# Altium PCB PCB1.PcbDoc
Units mm, origin at the board's own origin, x right, y up, seen from the top; angles counter-clockwise.
Board outline 47.62 x 51.43 mm, 2 copper layers (Top Layer, Bottom Layer); 94 components, 64 nets, 274 pads, 84 vias.
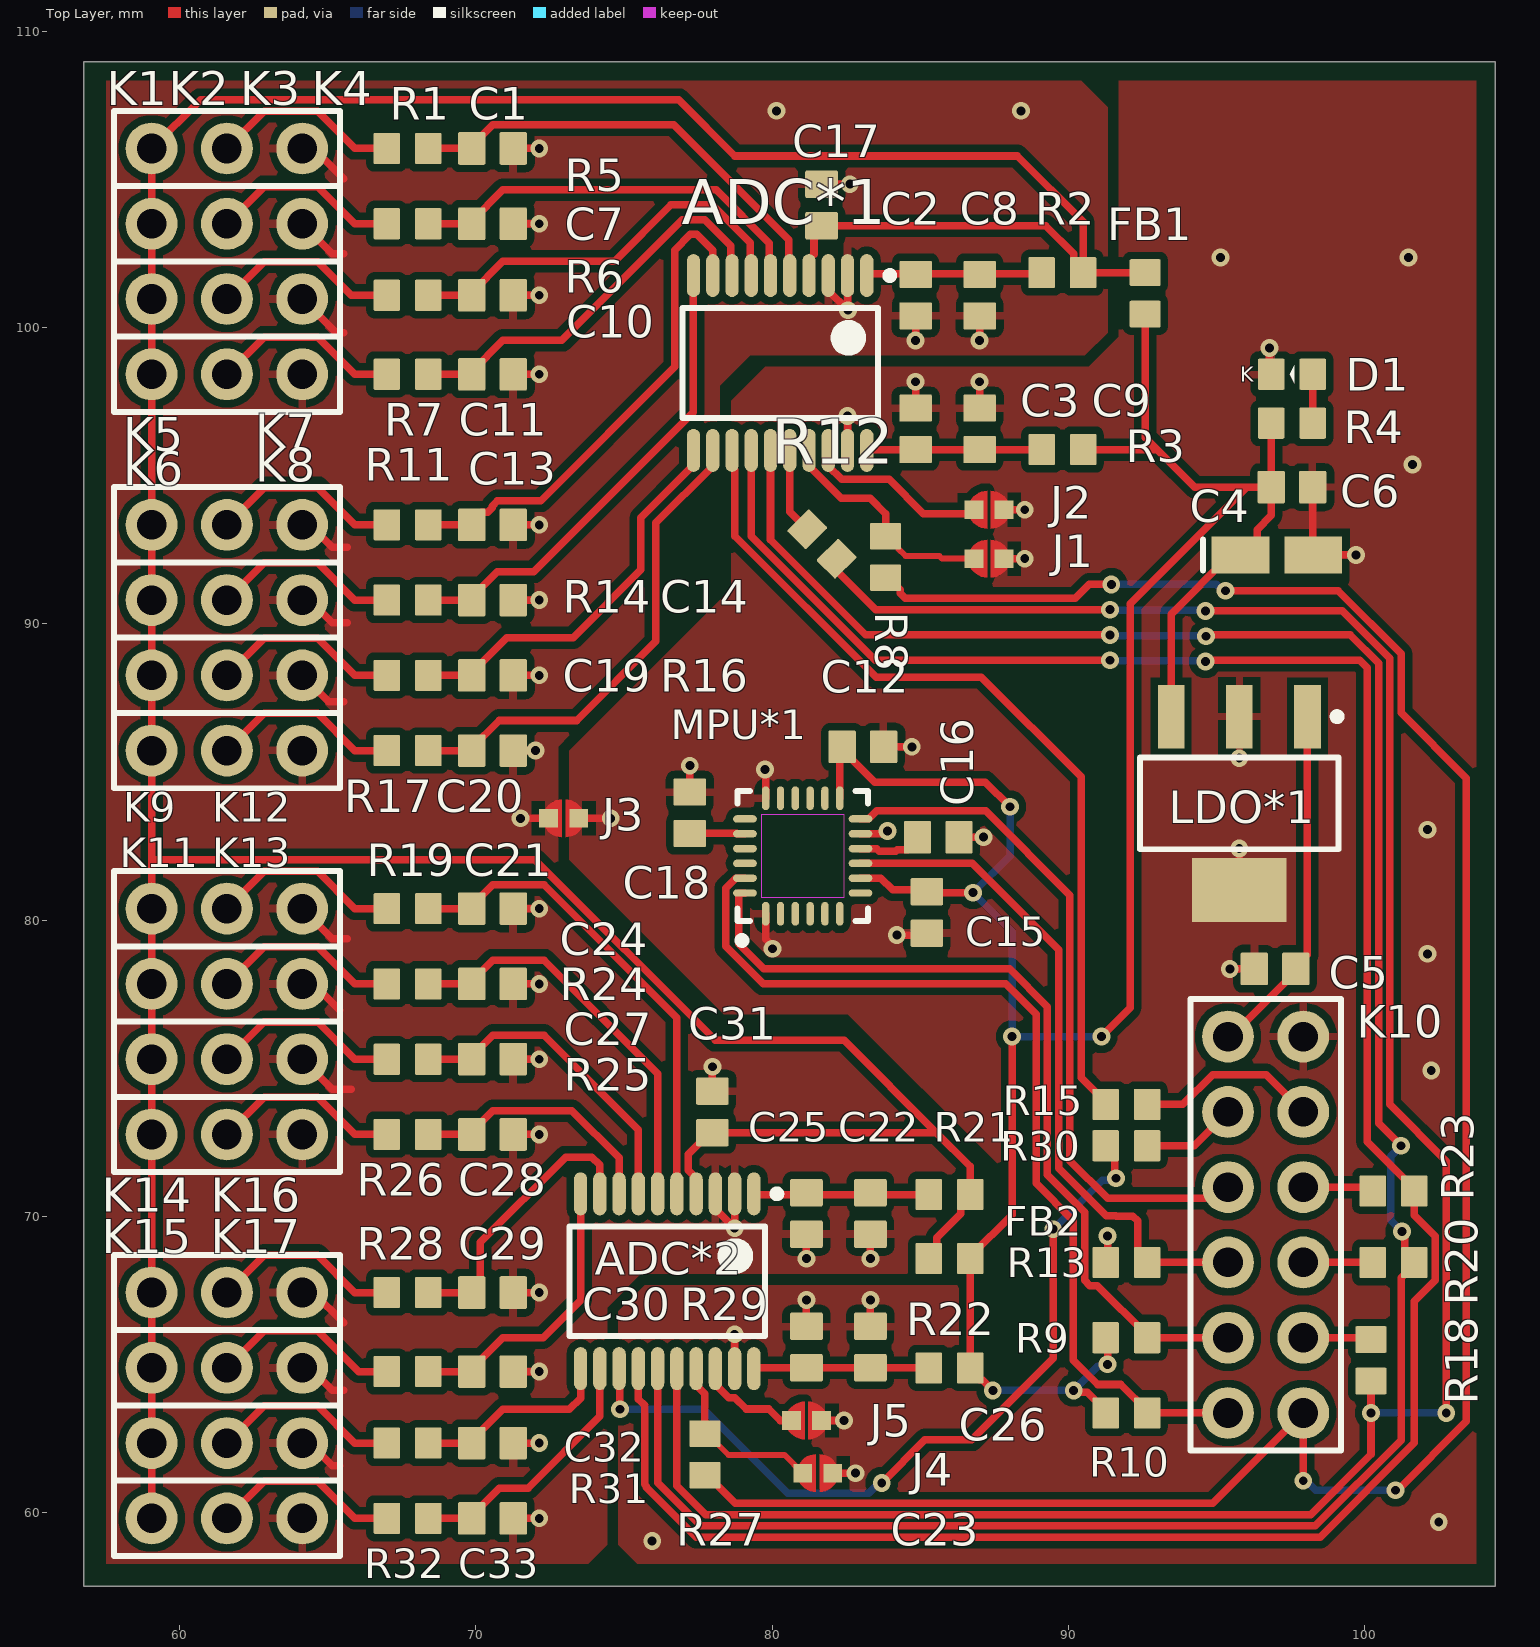
[diagram p0: Top Layer view]
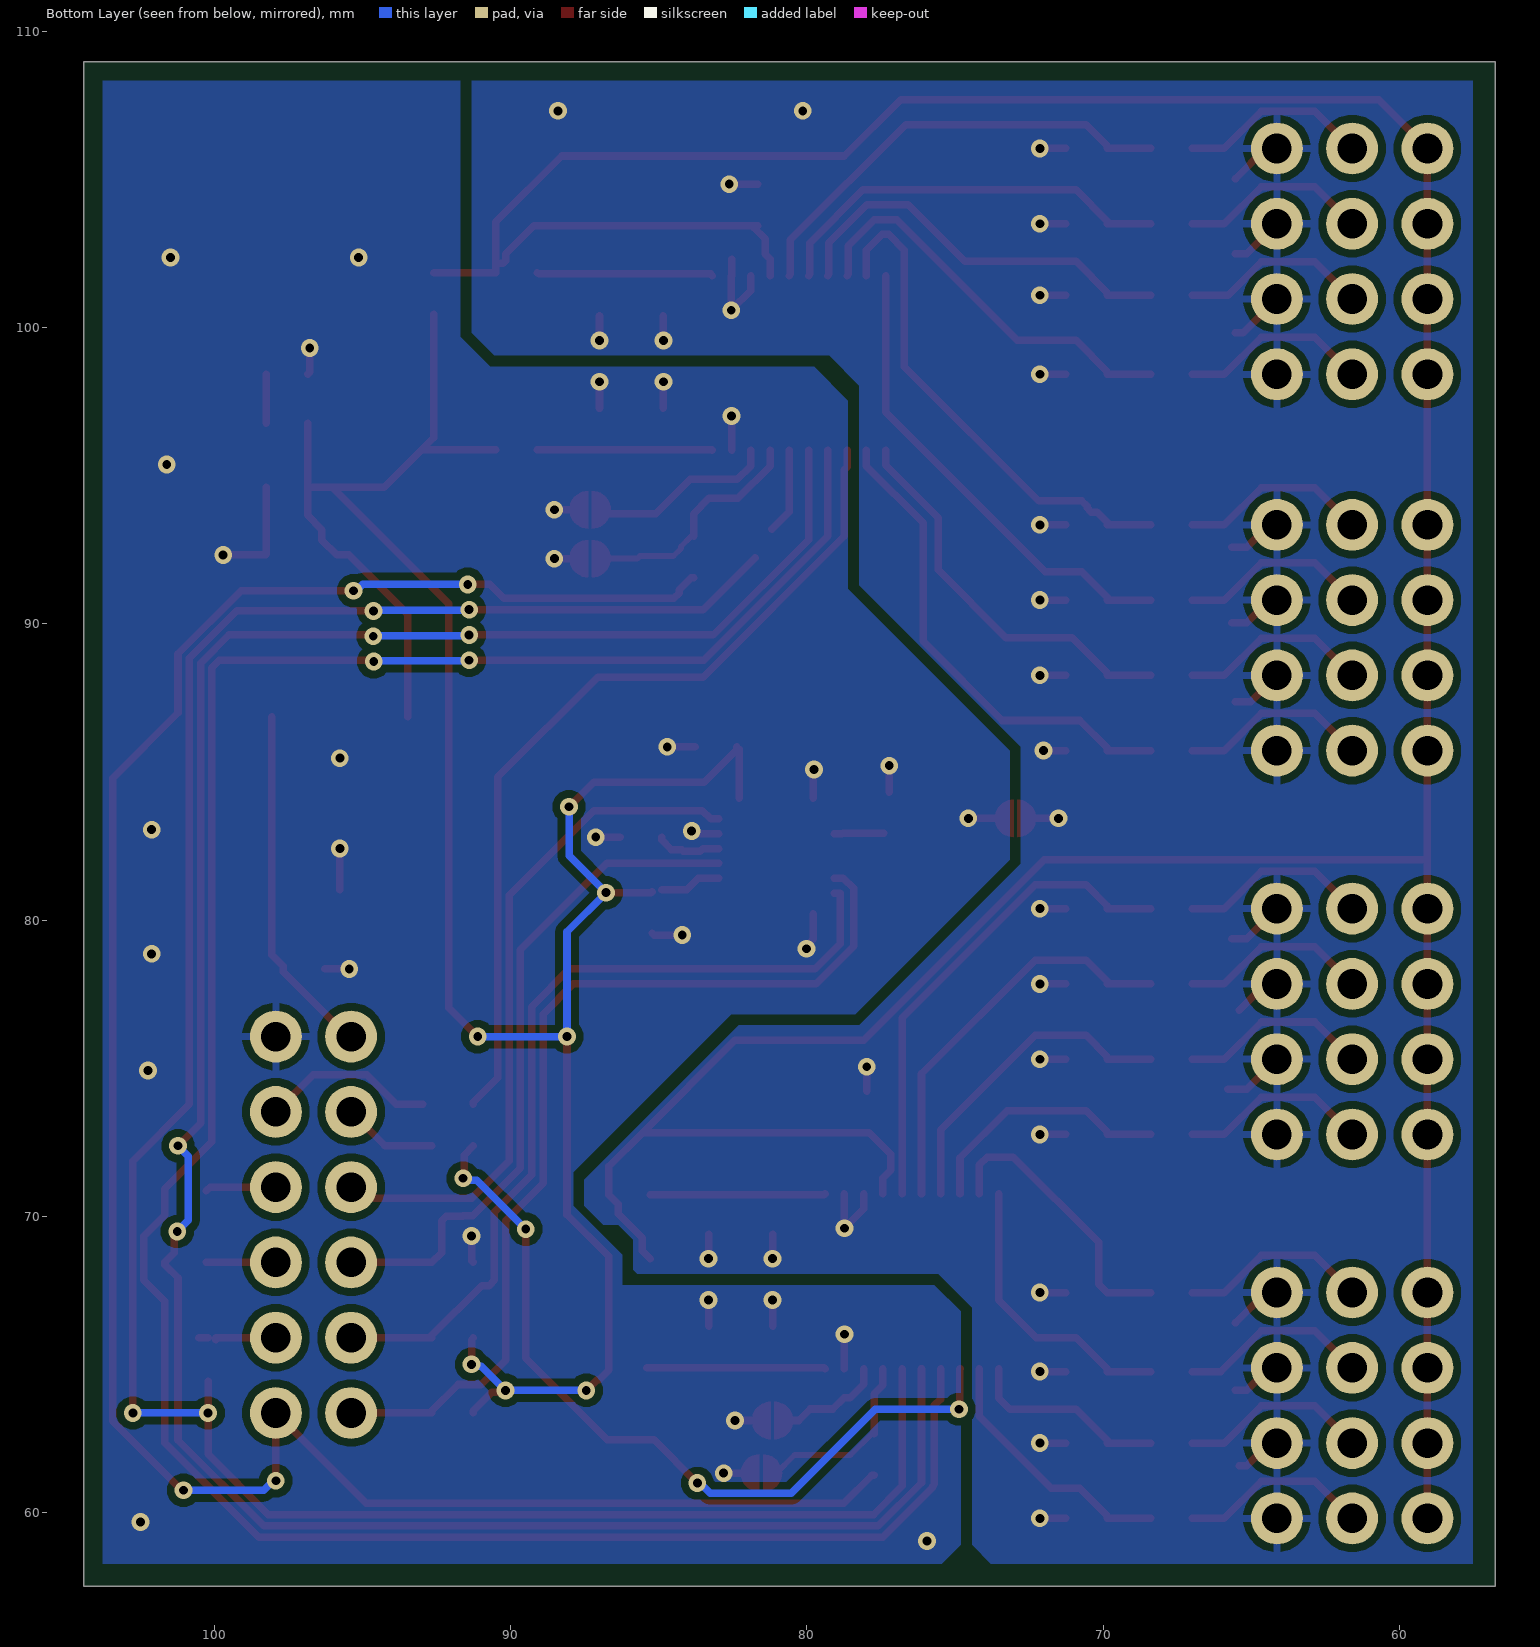
[diagram p1: Bottom Layer view, seen from below]

## Layer stack, top to bottom
Top Solder: solder mask 0.0102, Solder Resist, Dk 3.5
Top Layer: signal copper 0.0356
Dielectric 1: dielectric 0.32, FR-4, Dk 4.8
Bottom Layer: signal copper 0.0356
Bottom Solder: solder mask 0.0102, Solder Resist, Dk 3.5

## Board outline
56.769,57.531 56.769,108.966 104.394,108.966 104.394,57.531

## Design rules (kind name [scope] priority, off if disabled: settings)
Clearance [All] p1: gap=0.254 ignorepadtopadclearanceinfootprint=TRUE except(0: Arc-Hole Track-Hole SMDPad-Hole THPad-Hole Via-Hole Fill-Hole Poly-Hole Region-Hole Text-Hole; 0.127: Arc-Arc Arc-Track Arc-SMDPad Track-Track Track-SMDPad SMDPad-SMDPad SMDPad-Fill Region-Region)
PolygonConnect [All] p1: connectstyle=Relief reliefconductorwidth=0.254 reliefentries=4 polygonreliefangle="90 Angle" airgapwidth=0.254
RoutingVias [All] p1: holewidth=0.3 width=0.6 viastyle="Through Hole" minholewidth=0.1 minwidth=0.1 maxholewidth=0.711 maxwidth=1.27
SilkToSilkClearance [All] p1: silktosilkclearance=0.1
SolderMaskExpansion [All] p1: expansion=0.102 istentingtop=FALSE
Width [All] p1: maxlimit=0.254 minlimit=0.127 preferedwidth=0.254 bottomlayer_minwidth=0.254 minimp=50.000000 maximp=50.000000 favimp=50.000000
29 further rules are at their usual default settings.

## Classes and differential pairs
component class Sheet1: ADC1 ADC2 C1 C2 C3 C4 C5 C6 C7 C8 C9 C10 C11 C12 C13 C14 C15 C16 C17 C18 C19 C20 C21 C22 C23 C24 C25 C26 C27 C28 C29 C30 C31 C32 C33 D1 FB1 FB2 K1 K2 K3 K4 K5 K6 K7 K8 K9 K10 K11 K12 K13 K14 K15 K16 K17 LDO1 MPU1 R1 R2 R3 R4 R5 R6 R7 R8 R9 R10 R11 R12 R13 R14 R15 R16 R17 R18 R19 R20 R21 R22 R23 R24 R25 R26 R27 R28 R29 R30 R31 R32

## Components (designator, comment, footprint, x,y, rotation, side; value= is the part's Value field where it differs from the comment)
ADC*1 "MCP3464" "TSOP65P640X120-20N ADC" 80.264,98.806 r270 top
ADC*2 "MCP3464" "TSOP65P640X120-20N ADC" 76.454,67.818 r270 top
C1 "0.1uF" C1608_0603I_M 70.557,106.045 r180 top
C2 "0.1uF" C1608_0603I_M 84.836,101.092 r270 top
C3 "0.1uF" C1608_0603I_M 84.836,96.585 r270 top
C4 "10uF" "C Tantal A" 97.028,92.329 r0 top
C5 "4.7uF" C1608_0603I_M 96.963,78.359 r180 top
C6 "4.7uF" C1608_0603I_M 97.536,94.615 r0 top
C7 "0.1uF" C1608_0603I_M 70.557,103.505 r180 top
C8 "0.1uF" C1608_0603I_M 86.995,101.092 r270 top
C9 "0.1uF" C1608_0603I_M 86.995,96.585 r270 top
C10 "0.1uF" C1608_0603I_M 70.557,101.092 r180 top
C11 "0.1uF" C1608_0603I_M 70.557,98.425 r180 top
C12 "0.1uF" C1608_0603I_M 83.058,85.852 r180 top
C13 "0.1uF" C1608_0603I_M 70.557,93.345 r180 top
C14 "0.1uF" C1608_0603I_M 70.557,90.805 r180 top
C15 "10nF" C1608_0603I_M 85.217,80.264 r270 top
C16 "0.1uF" C1608_0603I_M 85.598,82.804 r180 top
C17 "0.1uF" C1608_0603I_M 81.661,104.14 r270 top
C18 "2.2nF" C1608_0603I_M 77.216,83.628 r90 top
C19 "0.1uF" C1608_0603I_M 70.557,88.265 r180 top
C20 "0.1uF" C1608_0603I_M 70.557,85.725 r180 top
C21 "0.1uF" C1608_0603I_M 70.557,80.391 r180 top
C22 "0.1uF" C1608_0603I_M 83.312,70.104 r270 top
C23 "0.1uF" C1608_0603I_M 81.153,65.597 r270 top
C24 "0.1uF" C1608_0603I_M 70.557,77.851 r180 top
C25 "0.1uF" C1608_0603I_M 81.153,70.104 r270 top
C26 "0.1uF" C1608_0603I_M 83.312,65.597 r270 top
C27 "0.1uF" C1608_0603I_M 70.557,75.311 r180 top
C28 "0.1uF" C1608_0603I_M 70.557,72.771 r180 top
C29 "0.1uF" C1608_0603I_M 70.557,67.437 r180 top
C30 "0.1uF" C1608_0603I_M 70.557,64.77 r180 top
C31 "0.1uF" C1608_0603I_M 77.978,73.533 r270 top
C32 "0.1uF" C1608_0603I_M 70.557,62.357 r180 top
C33 "0.1uF" C1608_0603I_M 70.557,59.817 r180 top
D1 "LED" LED1608_0603I_M 97.536,98.425 r0 top
FB1 "FERITTE BEAD" R1608_0603I_M 92.583,101.157 r90 top
FB2 "FERITTE BEAD" R1608_0603I_M 85.979,68.58 r180 top
J1 "JMP_mini" solderJumper 87.312,92.202 r180 top
J2 "JMP_mini" solderJumper 87.312,93.853 r180 top
J3 "JMP_mini" solderJumper 72.958,83.44 r0 top
J4 "JMP_mini" solderJumper 81.534,61.341 r180 top
J5 "JMP_mini" solderJumper 81.155,63.119 r180 top
K1 "H1x3" H1x3 59.055,106.045 r180 top
K2 "H1x3" H1x3 59.055,103.505 r180 top
K3 "H1x3" H1x3 59.055,100.965 r180 top
K4 "H1x3" H1x3 59.055,98.425 r180 top
K5 "H1x3" H1x3 59.055,93.345 r180 top
K6 "H1x3" H1x3 59.055,90.805 r180 top
K7 "H1x3" H1x3 59.055,88.265 r180 top
K8 "H1x3" H1x3 59.055,85.725 r180 top
K9 "H1x3" H1x3 59.055,80.391 r180 top
K10 "H2x6" H2x6 97.917,63.373 r270 top
K11 "H1x3" H1x3 59.055,77.851 r180 top
K12 "H1x3" H1x3 59.055,75.311 r180 top
K13 "H1x3" H1x3 59.055,72.771 r180 top
K14 "H1x3" H1x3 59.055,67.437 r180 top
K15 "H1x3" H1x3 59.055,64.897 r180 top
K16 "H1x3" H1x3 59.055,62.357 r180 top
K17 "H1x3" H1x3 59.055,59.817 r180 top
LDO*1 "TC1108" "SOT230P700X180-4N 3V3 LDO" 95.758,83.947 r270 top
MPU*1 "MPU6050" QFN50P400X400X95_HS-25N 81.026,82.169 r90 top
R1 "1k" R1608_0603I_M 67.691,106.045 r0 top
R2 "10" R1608_0603I_M 89.789,101.854 r180 top
R3 "10" R1608_0603I_M 89.789,95.885 r180 top
R4 "1k" R1608_0603I_M 97.536,96.774 r0 top
R5 "1k" R1608_0603I_M 67.691,103.505 r0 top
R6 "1k" R1608_0603I_M 67.691,101.092 r0 top
R7 "1k" R1608_0603I_M 67.691,98.425 r0 top
R8 "10" R1608_0603I_M 83.82,92.264 r270 top
R9 "4k7" R1608_0603I_M 91.948,65.913 r180 top
R10 "4k7" R1608_0603I_M 91.948,63.373 r0 top
R11 "1k" R1608_0603I_M 67.691,93.345 r0 top
R12 "10" R1608_0603I_M 81.674,92.697 r315 top
R13 "4k7" R1608_0603I_M 91.948,68.453 r180 top
R14 "1k" R1608_0603I_M 67.691,90.805 r0 top
R15 "10" R1608_0603I_M 91.948,73.787 r0 top
R16 "1k" R1608_0603I_M 67.691,88.265 r0 top
R17 "1k" R1608_0603I_M 67.691,85.725 r0 top
R18 "10" R1608_0603I_M 100.203,65.151 r90 top
R19 "1k" R1608_0603I_M 67.691,80.391 r0 top
R20 "10" R1608_0603I_M 100.965,68.453 r180 top
R21 "10" R1608_0603I_M 85.979,70.739 r180 top
R22 "10" R1608_0603I_M 85.979,64.897 r180 top
R23 "10" R1608_0603I_M 100.965,70.866 r180 top
R24 "1k" R1608_0603I_M 67.691,77.851 r0 top
R25 "1k" R1608_0603I_M 67.691,75.311 r0 top
R26 "1k" R1608_0603I_M 67.691,72.771 r0 top
R27 "10" R1608_0603I_M 77.724,61.976 r270 top
R28 "1k" R1608_0603I_M 67.691,67.437 r0 top
R29 "1k" R1608_0603I_M 67.691,64.77 r0 top
R30 "10" R1608_0603I_M 91.948,72.39 r0 top
R31 "1k" R1608_0603I_M 67.691,62.357 r0 top
R32 "1k" R1608_0603I_M 67.691,59.817 r0 top

## Footprints (in the part's own frame and the unit in brackets; to place one, negate y for a bottom-side part, rotate by r counter-clockwise, add the part's x,y. Pads: shape width x height; smd on the part's side, far side on the other; paste and mask are expansions set on the pad)
C1608_0603I_M [mm] "Chip Capacitor, 2-Leads, Body 1.57x0.85mm, IPC Low Density"
  rrect10% 0.92x1.1 smd: 1(-0.7,0) 2(0.7,0)
  body extent -0.82,-0.48 0.82,0.48, height 0.95
"C Tantal A" [mm] "Molded Capacitor, 2-Leads, Body 3,2x1,6mm, IPC Medium Density"
  rect 1.95x1.25 smd: 1(-1.225,0) 2(1.225,0)
  silkscreen extent -2.5,-0.53 -2.5,0.53, body extent -1.6,-0.81 1.6,0.79, height 1.63
H1x3 [mm]
  round 1.75 hole 1: 1(0,0) 2(-2.54,0) 3(-5.08,0)
  silkscreen extent -6.35,-1.27 1.27,1.27, body extent -6.35,-1.27 1.27,1.27, height 8.4
H2x6 [mm]
  round 1.75 hole 1: 1(0,0) 2(0,-2.54) 3(-2.54,0) 4(-2.54,-2.54) 5(-5.08,0) 6(-5.08,-2.54) 7(-7.62,0) 8(-7.62,-2.54) 9(-10.16,0) 10(-10.16,-2.54) 11(-12.7,0) 12(-12.7,-2.54)
  silkscreen extent -13.97,-3.81 1.27,1.27, body extent -13.97,-3.81 1.27,1.27, height 8.4
LED1608_0603I_M [mm] "SMD LED, 2-Leads, Body 1.57x0.85mm, IPC Low Density"
  rrect10% 0.9x1.05 smd: 1(-0.7,0) 2(0.7,0)
  silkscreen extent -0.07,-0.3 0.08,0.3, body extent -0.8,-0.4 0.8,0.4, height 0.7
QFN50P400X400X95_HS-25N [mm] "QFN, 24-Leads, Body 4.00x4.00mm, Pitch 0.50mm, Thermal Pad 2.60x2.70mm, IPC Medium Density"
  oval 0.8x0.25 smd: 1(-1.95,1.25) 2(-1.95,0.75) 3(-1.95,0.25) 4(-1.95,-0.25) 5(-1.95,-0.75) 6(-1.95,-1.25) 13(1.95,-1.25) 14(1.95,-0.75) 15(1.95,-0.25) 16(1.95,0.25) 17(1.95,0.75) 18(1.95,1.25)
  oval 0.25x0.8 smd: 7(-1.25,-1.95) 8(-0.75,-1.95) 9(-0.25,-1.95) 10(0.25,-1.95) 11(0.75,-1.95) 12(1.25,-1.95) 19(1.25,1.95) 20(0.75,1.95) 21(0.25,1.95) 22(-0.25,1.95) 23(-0.75,1.95) 24(-1.25,1.95)
  silkscreen extent -2.97,-2.2 2.2,2.2, body extent -2.05,-2.05 2.05,2.05, height 0.95
R1608_0603I_M [mm] "Chip Resistor, 2-Leads, Body 1.57x0.85mm, IPC Low Density"
  rrect10% 0.9x1.05 smd: 1(-0.7,0) 2(0.7,0)
  body extent -0.83,-0.48 0.82,0.48, height 0.5
solderJumper [mil]
  rect 25x25 smd: 1(20,0) 2(-20,0)
  Top Layer region: -2.51,25 -12.08,23.1 -20.19,17.68 -25.61,9.57 -27.51,0 -27.51,0 -25.61,-9.57 -20.19,-17.68 -12.08,-23.1 -2.51,-25 -2.51,-25
  Top Layer region: 2.51,25 12.08,23.1 20.19,17.68 25.61,9.57 27.51,0 27.51,0 25.61,-9.57 20.19,-17.68 12.08,-23.1 2.51,-25 2.51,-25
"SOT230P700X180-4N 3V3 LDO" [mm] "SOT223, 4-Leads, Body 6.50x7.00mm (avg), Pitch 2.30mm, IPC Medium Density"
  rect 2.15x0.9 smd: 1(-2.925,2.3) 2(-2.925,0) 3(-2.925,-2.3)
  rect 2.15x3.2 smd: 2(2.925,0)
  silkscreen extent -3.05,-3.35 1.55,3.43, body extent -3.5,-3.35 3.5,3.35, height 1.8
"TSOP65P640X120-20N ADC" [mm] "TSOP, 20-Leads, Body 6.50x4.40mm, Pitch 0.65mm, IPC Medium Density"
  oval 1.45x0.45 smd: 1(-2.95,2.925) 2(-2.95,2.275) 3(-2.95,1.625) 4(-2.95,0.975) 5(-2.95,0.325) 6(-2.95,-0.325) 7(-2.95,-0.975) 8(-2.95,-1.625) 9(-2.95,-2.275) 10(-2.95,-2.925) 11(2.95,-2.925) 12(2.95,-2.275) 13(2.95,-1.625) 14(2.95,-0.975) 15(2.95,-0.325) 16(2.95,0.325) 17(2.95,0.975) 18(2.95,1.625) 19(2.95,2.275) 20(2.95,2.925)
  silkscreen extent -3.07,-3.3 1.85,3.83, body extent -3.2,-3.3 3.2,3.3, height 1.2

## Part data
C1 C2 C3 C5 C6 C7 C8 C9 C10 C11 C12 C13 C14 C15 C16 C17 C18 C19 C20 C21 C22 C23 C24 C25 C26 C27 C28 C29 C30 C31 C32 C33: library part C, "Capacitor"
C4: library part C+, "Capacitor Polarized"
K1 K2 K3 K4 K5 K6 K7 K8 K9 K11 K12 K13 K14 K15 K16 K17: "Header 1x3 (male)"
K10: "Header 2x5 (male)"
R1 R2 R3 R4 R5 R6 R7 R8 R9 R10 R11 R12 R13 R14 R15 R16 R17 R18 R19 R20 R21 R22 R23 R24 R25 R26 R27 R28 R29 R30 R31 R32: library part R, "R"

## Via types
v1: diameter 0.6, hole 0.3, Top Layer to Bottom Layer, 84 vias

## Nets (pads, with @x,y where several pads share a name; then routed paths per layer and width w, separated by ;. In a path a pad name is that pad's centre, name@x,y a point inside that pad or via, vN(x,y) a via of type N, cw(c..) or ccw(c..) an arc to the next point about the centre after c; other vN are vias at no path point)
+5V: C5.1 K10.12 LDO*1.1 | length 12
  Top Layer w0.254: K10.12 95.467,76.073 97.663,78.269 C5.1 97.663,78.449 98.058,78.844 LDO*1.1
AD0: K10.6 MPU*1.9 R13.1 | length 22.9
  Top Layer w0.254: MPU*1.9 86.747,81.919 89.662,79.004 89.662,71.628 91.267,70.023 91.595,70.023 91.599,70.019 92.16,70.019 92.325,69.854 92.325,68.776 R13.1 K10.6
AVCC: ADC*1.4 ADC*2.4 C17.2 C31.2 FB1.2 FB2.2 K1.1 K2.1 K3.1 K4.1 K5.1 K6.1 K7.1 K8.1 K9.1 K11.1 K12.1 K13.1 K14.1 K15.1 K16.1 K17.1 R2.1 R21.1 | length 140.9
  Top Layer w0.254: K17.1 K16.1 K15.1 K14.1 K13.1 K12.1 K11.1 K9.1 59.055,82.042 ; ADC*2.4 77.429,71.295 77.16,71.564 77.16,72.105 77.888,72.833 C31.2 85.536,72.833 ; ADC*1.4 81.239,102.309 81.407,102.477 81.407,102.997 C17.2@81.788,103.378 ; C17.2 81.788,103.44 89.219,103.44 90.166,102.493 90.166,102.252 90.248,102.17 R2.1@90.489,102.17 ; FB2.2 85.547,68.848 85.547,69.291 86.356,70.1 86.356,70.416 R21.1 86.679,71.69 85.536,72.833 ; FB1.2 90.492,101.857 R2.1 R2.1@90.489,102.17 ; 59.055,82.042 K8.1 K7.1 K6.1 K5.1 K4.1 K3.1 K2.1 K1.1 60.706,107.696 76.835,107.696 78.74,105.791 88.265,105.791 90.489,103.567 R2.1@90.489,102.17 ; 59.055,82.042 71.987,82.042 78.083,75.946 82.423,75.946 85.536,72.833
CS1: K10.9 R15.2 | length 5.9
  Top Layer w0.254: R15.2@92.964,73.787 93.855,73.787 94.857,74.789 96.661,74.789 K10.9
CS2: K10.10 R30.2 | length 3.2
  Top Layer w0.254: R30.2 94.234,72.39 K10.10
DVCC: C4.1 C6.1 C12.2 C15.1 FB1.1 FB2.1 LDO*1.3 MPU*1.8 MPU*1.13 R3.1 R4.1 R9.2 R10.1 R22.1 | length 86.9
  Top Layer w0.254: MPU*1.13 C12.2@82.276,85.77 ; C12.2 82.358,85.762 83.457,84.663 87.189,84.663 v1(88.022,83.831) ; MPU*1.8 82.978,81.417 83.666,81.417 84.057,81.026 C15.1@84.898,81.026 ; C15.1 85.25,80.931 v1(86.773,80.931) ; v1(87.441,64.135) 87.077,64.499 87.002,64.499 86.679,64.822 R22.1 FB2.1 86.679,68.655 88.092,70.068 v1(88.092,76.073) ; v1(90.17,64.135) 90.236,64.069 90.627,64.069 91.248,63.448 R10.1 ; R3.1 92.989,95.885 ; v1(91.105,76.073) 92.075,77.043 92.075,90.678 96.012,94.615 ; R9.2 91.313,65.848 v1(91.313,65.015) ; FB1.1 92.583,96.291 92.989,95.885 ; LDO*1.3 93.458,90.334 95.453,92.329 95.863,92.329 96.361,92.827 96.361,93.186 96.836,93.661 C6.1 ; R4.1 C6.1 ; 92.989,95.885 94.259,94.615 96.012,94.615 ; 96.012,94.615 C6.1
  Bottom Layer w0.254: v1(87.441,64.135) v1(90.17,64.135) 90.984,64.949 91.247,64.949 v1(91.313,65.015) ; v1(88.022,83.831) 88.022,82.18 v1(86.773,80.931) 88.092,79.611 v1(88.092,76.073) v1(91.105,76.073)
GNDA: ADC*1.2 ADC*1.3 ADC*2.2 ADC*2.3 C1.1 C2.2 C7.1 C8.2 C10.1 C11.1 C13.1 C14.1 C17.1 C19.1 C20.1 C21.1 C22.2 C24.1 C25.2 C27.1 C28.1 C29.1 C30.1 C31.1 C32.1 C33.1 J3.2 K1.3 K2.3 K3.3 K4.3 K5.3 K6.3 K7.3 K8.3 K9.3 K11.3 K12.3 K13.3 K14.3 K15.3 K16.3 K17.3 | length 47.4
  Top Layer w0.254: K16.3 64.387,62.357 65.149,61.595 65.405,61.595 ; K15.3 64.387,64.897 65.149,64.135 65.532,64.135 ; K14.3 64.516,67.437 65.532,66.421 ; K12.3 65.151,74.295 65.786,74.295 ; K11.3 64.516,77.851 65.405,76.962 ; K9.3 65.151,79.375 65.659,79.375 ; K7.3 65.024,87.376 65.532,87.376 ; K6.3 64.387,90.805 65.149,90.043 65.659,90.043 ; K5.3 64.387,93.345 65.149,92.583 65.659,92.583 ; K3.3 65.278,99.822 65.532,99.822 ; K2.3 65.151,102.489 65.532,102.489 ; K1.3 64.516,106.045 65.532,105.029 ; C33.1 v1(72.136,59.817) ; C32.1 v1(72.136,62.357) ; C30.1 v1(72.136,64.77) ; C29.1 v1(72.136,67.437) ; C28.1 v1(72.136,72.771) ; C27.1 v1(72.136,75.311) ; C24.1 v1(72.136,77.851) ; C21.1 v1(72.136,80.391) ; C20.1 v1(72.009,85.725) ; C19.1 v1(72.136,88.265) ; C14.1 v1(72.136,90.805) ; C13.1 v1(72.136,93.345) ; C11.1 v1(72.136,98.425) ; C10.1 v1(72.136,101.092) ; C7.1 v1(72.136,103.505) ; C1.1 v1(72.136,106.045) ; v1(71.501,83.439) J3.2 ; C31.1 v1(77.978,75.057) ; ADC*2.3 78.079,70.257 v1(78.729,69.607) ADC*2.2 ; v1(81.153,68.58) C25.2 ; C17.1 v1(82.615,104.84) ; ADC*1.3 81.889,101.25 v1@82.545,100.595 ; ADC*1.2@82.539,102.309 ADC*1.2 82.545,101.75 v1@82.545,100.595 ; v1(82.55,100.584) 82.55,100.589 v1@82.545,100.595 ; v1(83.312,68.58) C22.2 ; v1(84.836,99.568) C2.2 ; v1(86.995,99.568) C8.2
  other v1: 80.137,107.315 88.392,107.315
GNDD: ADC*1.19 ADC*2.19 C3.1 C4.2 C5.2 C6.2 C9.1 C12.1 C15.2 C16.1 C18.2 C23.1 C26.1 D1.1 J1.2 J2.2 J3.1 J4.2 J5.2 K10.11 LDO*1.2 MPU*1.1 MPU*1.11 MPU*1.18 R13.2 | length 24.7
  Top Layer w0.254: J3.1 v1(74.549,83.439) ; C18.2 v1(77.216,85.217) ; ADC*2.19 v1(78.729,66.029) ; v1(79.756,85.09) 79.774,85.072 79.774,84.121 MPU*1.18 ; MPU*1.1 79.776,79.368 80.01,79.134 v1(80.01,79.04) ; C23.1 v1(81.153,67.183) ; J5.2@81.534,63.119 v1(82.423,63.119) ; J4.2 v1(82.804,61.341) ; ADC*1.19 v1(82.539,97.017) ; MPU*1.11 82.978,82.921 83.699,82.921 83.79,83.012 v1(83.884,83.012) ; C26.1 v1(83.312,67.183) ; C12.1 v1(84.709,85.852) ; v1(84.201,79.502) 85.155,79.502 C15.2 ; C3.1 v1(84.836,98.171) ; C16.1 v1(87.122,82.804) ; C9.1 v1(86.995,98.171) ; J1.2 v1(88.519,92.202) ; J2.2 v1(88.519,93.853) ; R13.2 91.313,68.518 v1(91.313,69.342) ; v1(95.439,78.359) C5.2 ; LDO*1.2@95.758,81.022 v1(95.758,82.423) ; v1(96.774,99.314) 96.774,98.487 D1.1 ; C6.2 98.236,92.346 C4.2 v1(99.695,92.329)
  other v1: 75.946,59.055 102.489,59.69 102.235,74.93 102.108,78.867 102.108,83.058 95.758,85.471 101.6,95.377 95.123,102.362 101.473,102.362
INT: K10.8 MPU*1.12 | length 23.3
  Top Layer w0.254: MPU*1.12 83.247,83.419 83.521,83.693 87.196,83.693 90.043,80.846 90.043,71.882 91.313,70.612 94.591,70.612 94.972,70.993 K10.8
MDAT: K10.1 R8.2 R27.2 | length 76.5
  Top Layer w0.254: R27.2 77.799,61.276 78.75,60.325 94.869,60.325 K10.1 v1(97.917,61.087) ; R8.2 83.895,91.564 84.311,91.148 84.311,91.038 84.486,90.863 90.228,90.863 90.699,91.334 v1(91.441,91.334) ; v1(95.294,91.122) 99.09,91.122 101.219,88.992 101.219,86.995 103.424,84.79 103.424,63.091 101.098,60.765 v1(101.033,60.765)
  Bottom Layer w0.254: v1(91.441,91.334) 94.988,91.334 95.2,91.122 v1(95.294,91.122) ; v1(97.917,61.087) 98.011,61.087 98.332,60.765 v1(101.033,60.765)
MISO: ADC*2.16 R12.2 R18.1 | length 80.4
  Top Layer w0.254: ADC*2.16 76.779,60.913 77.748,59.944 98.171,59.944 100.203,61.976 v1(100.203,63.373) R18.1 ; R12.2@81.743,92.234 83.496,90.481 v1(91.394,90.481) ; v1(94.62,90.441) 99.232,90.441 100.838,88.835 100.838,73.787 102.75,71.875 102.75,64.396 102.743,64.389 v1(102.743,63.373)
  Bottom Layer w0.254: v1(91.394,90.481) 91.414,90.461 94.6,90.461 v1(94.62,90.441) ; v1(100.203,63.373) v1(102.743,63.373)
MOSI: ADC*1.15 ADC*2.15 R20.1 | length 83.2
  Top Layer w0.254: ADC*2.15 76.129,61.024 77.59,59.563 98.329,59.563 101.219,62.453 101.219,67.932 101.665,68.378 R20.1 101.342,68.776 101.342,69.305 101.245,69.402 v1(101.245,69.495) ; ADC*1.15 79.939,92.846 83.158,89.627 v1(91.394,89.627) ; v1(94.631,89.583) 94.675,89.627 99.507,89.627 100.457,88.677 100.457,73.152 v1(101.219,72.39)
  Bottom Layer w0.254: v1(91.394,89.627) 91.416,89.605 94.609,89.605 v1(94.631,89.583) ; v1(101.219,72.39) 100.871,72.042 100.871,69.87 v1(101.245,69.495)
NetADC*1_1: ADC*1.1 C2.1 C8.1 R2.2 | length 5.9
  Top Layer w0.254: ADC*1.1 83.248,101.815 89.05,101.815 R2.2
NetADC*1_5: ADC*1.5 C1.2 R1.2 | length 15.4
  Top Layer w0.254: R1.2 C1.2 69.857,106.135 70.571,106.849 76.666,106.849 80.551,102.964 80.551,101.794 ADC*1.5
NetADC*1_6: ADC*1.6 C7.2 R5.2 | length 13.9
  Top Layer w0.254: R5.2 C7.2 69.857,103.595 70.91,104.648 78.105,104.648 79.901,102.852 79.901,101.794 ADC*1.6
NetADC*1_7: ADC*1.7 C10.2 R6.2 | length 13.8
  Top Layer w0.254: R6.2 C10.2 69.857,101.182 70.91,102.235 74.676,102.235 76.581,104.14 77.978,104.14 79.251,102.867 79.251,101.794 ADC*1.7
NetADC*1_8: ADC*1.8 C11.2 R7.2 | length 13.8
  Top Layer w0.254: R7.2 C11.2 69.857,98.515 70.91,99.568 72.898,99.568 76.962,103.632 77.724,103.632 78.601,102.755 78.601,101.794 ADC*1.8
NetADC*1_9: ADC*1.9 C13.2 R11.2 | length 17.1
  Top Layer w0.254: R11.2 C13.2 69.857,93.435 70.19,93.768 70.394,93.768 70.543,93.917 70.543,93.973 70.719,94.149 72.178,94.149 76.708,98.679 76.708,102.616 77.238,103.146 77.448,103.146 77.989,102.605 ADC*1.9
NetADC*1_10: ADC*1.10 C14.2 R14.2 | length 16.2
  Top Layer w0.254: R14.2 C14.2 69.857,90.895 70.719,91.757 71.945,91.757 77.339,97.151 ADC*1.10
NetADC*1_11: ADC*1.11 C19.2 R16.2 | length 13.5
  Top Layer w0.254: R16.2 C19.2 69.857,88.355 71.037,89.535 73.279,89.535 75.565,91.821 75.565,93.582 77.339,95.356 ADC*1.11
NetADC*1_12: ADC*1.12 C20.2 R17.2 | length 16.5
  Top Layer w0.254: R17.2 C20.2 69.857,85.815 70.783,86.741 73.406,86.741 76.073,89.408 76.073,93.413 77.989,95.329 ADC*1.12
NetADC*1_13: ADC*1.13 R15.1 | length 29.4
  Top Layer w0.254: ADC*1.13 78.639,95.303 78.74,95.202 78.74,92.967 83.5,88.207 87.053,88.207 90.424,84.836 90.424,74.686 91.248,73.862 R15.1
NetADC*1_16: ADC*1.16 R12.1 | length 2.9
  Top Layer w0.254: ADC*1.16 80.589,93.782 R12.1
NetADC*1_17: ADC*1.17 J1.1 R8.1 | length 7.9
  Top Layer w0.2: R8.1 83.895,92.964 84.245,92.614 84.245,92.542 84.497,92.29 85.637,92.29 85.725,92.202 J1.1 J1.1@86.762,92.244
  Top Layer w0.254: ADC*1.17 81.239,95.329 82.334,94.234 83.312,94.234 83.82,93.726 R8.1
NetADC*1_18: ADC*1.18 J2.1 | length 6.2
  Top Layer w0.254: ADC*1.18 81.889,95.329 82.341,94.877 83.939,94.877 85.09,93.726 86.677,93.726 J2.1
NetADC*1_20: ADC*1.20 C3.2 C9.2 R3.2 | length 5.9
  Top Layer w0.254: ADC*1.20 83.213,95.88 89.084,95.88 R3.2
NetADC*2_1: ADC*2.1 C22.1 C25.1 R21.2 | length 5.9
  Top Layer w0.254: ADC*2.1 79.403,70.744 85.274,70.744 R21.2
NetADC*2_5: ADC*2.5 C21.2 R19.2 | length 16.6
  Top Layer w0.254: R19.2 C21.2 69.857,80.481 70.571,81.195 72.295,81.195 76.779,76.711 ADC*2.5
NetADC*2_6: ADC*2.6 C24.2 R24.2 | length 13.8
  Top Layer w0.254: R24.2 C24.2 69.857,77.941 70.571,78.655 72.295,78.655 76.129,74.821 ADC*2.6
NetADC*2_7: ADC*2.7 C27.2 R25.2 | length 11
  Top Layer w0.254: R25.2 C27.2 69.857,75.401 70.571,76.115 72.295,76.115 75.479,72.931 ADC*2.7
NetADC*2_8: ADC*2.8 C28.2 R26.2 | length 8.7
  Top Layer w0.254: R26.2 C28.2 69.857,72.861 70.571,73.575 73.237,73.575 74.829,71.983 ADC*2.8
NetADC*2_9: ADC*2.9 C29.2 R28.2 | length 9.6
  Top Layer w0.254: R28.2 C29.2 70.144,67.724 70.144,69.128 73.025,72.009 73.914,72.009 74.179,71.744 ADC*2.9
NetADC*2_10: ADC*2.10 C30.2 R29.2 | length 9.8
  Top Layer w0.254: R29.2 C30.2 69.857,64.86 70.91,65.913 72.263,65.913 73.529,67.179 ADC*2.10
NetADC*2_11: ADC*2.11 C32.2 R31.2 | length 6.8
  Top Layer w0.254: R31.2 C32.2 69.857,62.447 70.91,63.5 73.152,63.5 73.529,63.877 ADC*2.11
NetADC*2_12: ADC*2.12 C33.2 R32.2 | length 8.9
  Top Layer w0.254: R32.2 C33.2 69.857,59.907 70.783,60.833 71.755,60.833 74.179,63.257 ADC*2.12
NetADC*2_13: ADC*2.13 R30.1 | length 27.5
  Top Layer w0.254: ADC*2.13 74.845,64.852 74.845,63.515 v1(74.86,63.5) ; v1(83.693,61.006) 85.15,62.463 86.732,62.463 89.482,65.213 v1(89.482,69.575) ; R30.1 91.561,72.077 91.561,71.328 v1(91.595,71.293)
  Bottom Layer w0.254: v1(74.86,63.5) 77.684,63.5 80.524,60.66 83.253,60.66 83.599,61.006 v1(83.693,61.006) ; v1(89.482,69.575) 91.134,71.227 91.529,71.227 v1(91.595,71.293)
NetADC*2_17: ADC*2.17 J4.1 R27.1 | length 6.2
  Top Layer w0.2: R27.1 77.799,62.676 78.522,61.953 80.414,61.953 J4.1
  Top Layer w0.254: ADC*2.17 77.429,64.315 77.724,64.02 R27.1
NetADC*2_18: ADC*2.18 J5.1 | length 3.6
  Top Layer w0.254: ADC*2.18 78.079,64.341 78.531,63.889 78.739,63.889 79.121,63.507 79.879,63.507 80.268,63.119 J5.1
NetADC*2_20: ADC*2.20 C23.2 C26.2 R22.2 | length 6
  Top Layer w0.254: ADC*2.20 79.404,64.892 81.153,64.892 83.312,64.892 85.401,64.892 R22.2@85.406,64.897
NetC16_2: C16.2 MPU*1.10 | length 2.2
  Top Layer w0.254: MPU*1.10 82.978,82.417 83.516,82.417 83.602,82.331 84.166,82.331 84.216,82.381 84.565,82.381 84.898,82.714 C16.2
NetC18_1: C18.1 MPU*1.20 | length 1.7
  Top Layer w0.254: C18.1@77.408,82.931 78.793,82.931 78.805,82.919 MPU*1.20
NetD1_2: D1.2 R4.2 | length 1.7
  Top Layer w0.254: R4.2 D1.2
NetK1_2: K1.2 R1.1 | length 6.4
  Top Layer w0.254: K1.2 62.851,107.301 64.655,107.301 65.911,106.045 R1.1
NetK2_2: K2.2 R5.1 | length 6.4
  Top Layer w0.254: K2.2 62.851,104.761 64.655,104.761 65.911,103.505 R5.1
NetK3_2: K3.2 R6.1 | length 6.4
  Top Layer w0.254: K3.2 62.851,102.221 64.655,102.221 65.784,101.092 R6.1
NetK4_2: K4.2 R7.1 | length 6.4
  Top Layer w0.254: K4.2 62.851,99.681 64.655,99.681 65.911,98.425 R7.1
NetK5_2: K5.2 R11.1 | length 6.4
  Top Layer w0.254: K5.2 62.851,94.601 64.655,94.601 65.911,93.345 R11.1
NetK6_2: K6.2 R14.1 | length 6.4
  Top Layer w0.254: K6.2 62.851,92.061 64.655,92.061 65.911,90.805 R14.1
NetK7_2: K7.2 R16.1 | length 6.4
  Top Layer w0.254: K7.2 62.851,89.521 64.655,89.521 65.911,88.265 R16.1
NetK8_2: K8.2 R17.1 | length 6.4
  Top Layer w0.254: K8.2 62.851,86.981 64.655,86.981 65.911,85.725 R17.1
NetK9_2: K9.2 R19.1 | length 6.4
  Top Layer w0.254: K9.2 62.851,81.647 64.655,81.647 65.911,80.391 R19.1
NetK10_3: K10.3 R18.2 | length 2.3
  Top Layer w0.254: K10.3 R18.2@99.949,65.913 ; R18.2@100.203,65.913 R18.2@100.519,65.913
NetK10_5: K10.5 R20.2 | length 2.3
  Top Layer w0.254: K10.5 R20.2
NetK10_7: K10.7 R23.2 | length 2.4
  Top Layer w0.254: K10.7 100.138,70.993 R23.2
NetK11_2: K11.2 R24.1 | length 6.4
  Top Layer w0.254: K11.2 62.851,79.107 64.655,79.107 65.911,77.851 R24.1
NetK12_2: K12.2 R25.1 | length 6.4
  Top Layer w0.254: K12.2 62.851,76.567 64.655,76.567 65.911,75.311 R25.1
NetK13_2: K13.2 R26.1 | length 6.4
  Top Layer w0.254: K13.2 62.851,74.027 64.655,74.027 65.911,72.771 R26.1
NetK14_2: K14.2 R28.1 | length 6.4
  Top Layer w0.254: K14.2 62.851,68.693 64.655,68.693 65.911,67.437 R28.1
NetK15_2: K15.2 R29.1 | length 6.5
  Top Layer w0.254: K15.2 62.851,66.153 64.655,66.153 66.038,64.77 R29.1
NetK16_2: K16.2 R31.1 | length 6.4
  Top Layer w0.254: K16.2 62.851,63.613 64.655,63.613 65.911,62.357 R31.1
NetK17_2: K17.2 R32.1 | length 6.4
  Top Layer w0.254: K17.2 62.851,61.073 64.655,61.073 65.911,59.817 R32.1
SCK: ADC*1.14 ADC*2.14 R23.1 | length 85
  Top Layer w0.254: ADC*2.14 75.479,63.844 75.692,63.631 75.692,60.96 75.748,60.904 75.748,60.867 77.433,59.182 98.487,59.182 101.665,62.36 101.665,67.145 102.369,67.849 102.369,69.335 101.665,70.039 101.665,70.941 100.076,72.53 100.076,88.519 99.822,88.773 94.658,88.773 v1(94.614,88.729) ; ADC*1.14 79.289,92.957 83.473,88.773 v1(91.394,88.773)
  Bottom Layer w0.254: v1(91.394,88.773) 91.416,88.751 94.592,88.751 v1(94.614,88.729)
SCL: K10.2 MPU*1.23 R10.2 | length 32.4
  Top Layer w0.254: MPU*1.23 78.765,81.419 78.422,81.076 78.422,79.116 79.687,77.851 87.884,77.851 88.9,76.835 88.9,71.12 90.163,69.857 90.163,65.158 90.987,64.334 91.762,64.334 92.648,63.448 R10.2 K10.2
SDA: K10.4 MPU*1.24 R9.1 | length 28.7
  Top Layer w0.254: MPU*1.24 78.869,80.919 78.867,80.917 78.867,79.21 79.718,78.359 88.011,78.359 89.281,77.089 89.281,71.405 90.544,70.142 90.544,67.849 90.719,67.674 90.962,67.674 92.648,65.988 R9.1 K10.4
pads on no net: MPU*1.2 MPU*1.3 MPU*1.4 MPU*1.5 MPU*1.6 MPU*1.7 MPU*1.14 MPU*1.15 MPU*1.16 MPU*1.17 MPU*1.19 MPU*1.21 MPU*1.22

## Polygon pours and split planes (outlines as drawn)
GNDD on Bottom Layer "GNDD_L02_P003" (solid, pour order 3): 91.694,108.331 91.694,99.695 90.678,98.679 79.756,98.679 78.613,97.536 78.613,91.186 73.152,85.725 73.152,82.042 78.359,76.835 82.55,76.835 87.884,71.501 87.884,70.358 86.233,68.707 86.233,67.691 75.692,67.691 74.803,66.802 74.803,58.928 75.438,58.293 103.759,58.293 103.759,108.331
GNDA on Bottom Layer "GNDA_L02_P001" (solid, pour order 1): 57.531,58.293 73.787,58.293 74.422,58.928 74.422,66.929 75.565,68.072 85.725,68.072 85.852,68.199 85.852,69.215 86.36,69.723 86.868,69.723 87.503,70.358 87.503,71.247 82.296,76.454 78.232,76.454 72.771,81.915 72.771,85.852 78.232,91.313 78.232,98.044 79.248,99.06 90.551,99.06 91.313,99.822 91.313,108.331 57.531,108.331
GNDD on Top Layer "GNDD_L01_P004" (solid, remove dead copper, pour order 4): 91.694,108.331 91.694,99.695 90.678,98.679 79.756,98.679 78.613,97.536 78.613,91.186 73.152,85.725 73.152,82.042 78.359,76.835 82.55,76.835 87.884,71.501 87.884,70.358 86.233,68.707 86.233,67.691 75.692,67.691 74.803,66.802 74.803,58.928 75.438,58.293 103.759,58.293 103.759,108.331
GNDA on Top Layer "tga" (solid, remove dead copper, pour order 2): 57.531,58.293 73.787,58.293 74.422,58.928 74.422,66.929 75.565,68.072 85.852,68.072 85.979,68.199 85.979,69.342 86.36,69.723 86.868,69.723 87.503,70.358 87.503,71.247 82.296,76.454 78.232,76.454 72.771,81.915 72.771,85.852 78.232,91.313 78.232,98.044 79.248,99.06 90.551,99.06 91.313,99.822 91.313,107.442 90.424,108.331 57.531,108.331

## Keep-outs
Top Layer:
  rectangle: 79.629,80.772 82.423,83.566

## Silkscreen, mask and mechanical layers (free items; w line width, h text height)
Mechanical 2:
  lines w0.254: 56.769,57.531 56.769,108.966 57.023,108.966 104.394,108.966 104.394,57.531 56.769,57.531

## Text inside footprints (layer, text, board x,y; h text height)
D1: Top Overlay "K" at 95.786,98.175 h0.5